# EAGLE board IoT Project (EAGLE 9.7.0)

Size 635.69 x 374.92 mm. Coordinates in mm from the lower left corner, seen from the top.
Outline: 0,0 635.69,0 635.69,374.92 0,374.92 0,0
Copper layers (1*16): Top 0.035mm / dielectric 1.5mm / Bottom 0.035mm
Design rules "default": minimum track width 6mil, minimum drill 0.35mm, track to track 6mil, track to pad 6mil, pad to pad 6mil, via to via 6mil, smd to smd 6mil, copper to edge 40mil, drill to drill 6mil, minimum pad ring 10mil, minimum via ring 8mil, stop-mask expansion 4mil, vias tented up to drill 0mil, thermal gap 10mil

## Footprints (pad centres in the part's own frame; a part is rotated, then mirrored left to right if it is on the bottom)
LEDRD254W60D565H860B_G = drill 0.981 pad 1.581: 1 -1.27,0; 2 1.27,0
LEDRD254W60D565H860B = drill 0.981 pad 1.581: 1 -1.27,0; 2 1.27,0
HC-SR04 = drill 1.016 long: 1 -3.81,0; 2 -1.27,0; 3 1.27,0; 4 3.81,0
PIEZO = drill 1 pad 1.6: 1 -3.5,0; 2 3.5,0
RESAD1016W63L850D250B = drill 0.83 pad 1.43: 1 -5.08,0; 2 5.08,0
GL5528 = drill 0.8 pad 1.4: 1 -1.702,0; 2 1.702,0
HA-06-SM065 = drill 1 pad 1.676: 1 -2.54,-2.54; 2 0,2.54; 3 2.54,-2.54
SWITCH-MOMENTARY-PTH-6.5MM = drill 1.016 pad 1.88: 1 -3.251,2.261; 2 3.251,2.261; 3 -3.251,-2.261; 4 3.251,-2.261
SG90 = drill 1.016 long: 1 -2.54,0; 2 0,0; 3 2.54,0
ARDUINO-UNO-R3-SHIELD = drill 1.016 pad 1.88: 3.3V 24.13,-2.54; 5V 24.13,0; A0 24.13,12.7; A1 24.13,15.24; A2 24.13,17.78; A3 24.13,20.32; A4 24.13,22.86; A5 24.13,25.4; AREF -24.13,-13.97; D2 -24.13,20.32; D3 -24.13,17.78; D4 -24.13,15.24; D5 -24.13,12.7; D6 -24.13,10.16; D7 -24.13,7.62; D8 -24.13,3.81; D9 -24.13,1.27; D10 -24.13,-1.27; D11 -24.13,-3.81; D12 -24.13,-6.35; D13 -24.13,-8.89; GND@0 24.13,2.54; GND@1 24.13,5.08; GND@2 -24.13,-11.43; IOREF 24.13,-7.62; NC 24.13,-10.16; RES 24.13,-5.08; RX -24.13,25.4; SCL -24.13,-19.05; SDA -24.13,-16.51; TX -24.13,22.86; VIN 24.13,7.62
JHD-162A = drill 1.016 long: 1 -19.05,0; 2 -16.51,0; 3 -13.97,0; 4 -11.43,0; 5 -8.89,0; 6 -6.35,0; 7 -3.81,0; 8 -1.27,0; 9 1.27,0; 10 3.81,0; 11 6.35,0; 12 8.89,0; 13 11.43,0; 14 13.97,0; 15 16.51,0; 16 19.05,0
TO92 = drill 0.813 octagon: 1 -1.27,0; 2 0,1.905; 3 1.27,0

## Placement (x,y rotation side)
D1  GREEN  [LEDRD254W60D565H860B_G]  487.08,83.31 180 top
D2  RED  [LEDRD254W60D565H860B]  494.7,83.31 180 top
DIST1  DISTANCE-SENSOR-4PINHC-SR04  [HC-SR04]  465.22,343.26 0 top
PIEZO1  PIEZO  [PIEZO]  472.03,123.31 0 top
R1  220  [RESAD1016W63L850D250B]  475.65,90.93 270 top
R2  1k  [RESAD1016W63L850D250B]  485.81,75.69 90 top
R3  220  [RESAD1016W63L850D250B]  331.83,315.68 270 top
R4  PHOTOCELL_GL5528  [GL5528]  363.58,313.14 0 top
R5  1k  [RESAD1016W63L850D250B]  357.23,318.22 90 top
R6  1k  [RESAD1016W63L850D250B]  349.61,318.22 90 top
R7  1k  [RESAD1016W63L850D250B]  493.43,75.69 90 top
RPOT1  250k  [HA-06-SM065]  339.45,305.52 0 top
RPOT2  250k  [HA-06-SM065]  435.01,65.53 0 top
S1  SWITCH_MOMENTARY  [SWITCH-MOMENTARY-PTH-6.5MM]  352.15,299.17 90 top
SERVO1  SERVOSG90  [SG90]  628.7,302.85 0 top
SERVO2  SERVOSG90  [SG90]  493.02,109.55 180 top
U1  ARDUINO-UNO-R3-SHIELD  [ARDUINO-UNO-R3-SHIELD]  555.94,285.34 270 top
U2  ARDUINO-UNO-R3-SHIELD  [ARDUINO-UNO-R3-SHIELD]  365.71,84.71 270 top
U3  ARDUINO-UNO-R3-SHIELD  [ARDUINO-UNO-R3-SHIELD]  47.88,345.07 270 top
U4  LCD-16X2JHD-162A  [JHD-162A]  453.4,36.63 0 top
U9  ARDUINO-UNO-R3-SHIELD  [ARDUINO-UNO-R3-SHIELD]  287.64,335.7 270 top
U10  LCD-16X2JHD-162A  [JHD-162A]  366.62,360.17 0 top
U11  TMP36GT9Z_TO92  [TO92]  387.71,305.52 0 top

## Library data of the parts
D1 = Tinkercad; CATEGORY: Opto-Electronic; SUB-CATEGORY: LED; VALUE: LED_GREEN
D2 = Tinkercad; CATEGORY: Opto-Electronic; SUB-CATEGORY: LED; VALUE: LED_RED
DIST1 PIEZO1 R1-R7 RPOT1 RPOT2 S1 SERVO1 SERVO2 U1-U4 U9-U11 = Tinkercad

## Nets
D1_C: D1.2 R2.2
D2_C: D2.2 R7.2
U1_5V: DIST1.1 SERVO1.2 U1.5V
U1_D5: SERVO1.3 U1.D5
U1_D6: DIST1.3 U1.D6
U1_D7: DIST1.2 U1.D7
U1_GND: DIST1.4 PIEZO1.2 R5.2 R6.2 RPOT1.3 RPOT2.3 SERVO1.1 SERVO2.1 U1.GND@0 U1.GND@1 U1.GND@2 U2.GND@0 U2.GND@1 U2.GND@2 U3.GND@0 U3.GND@1 U3.GND@2 U4.1 U4.5 U4.16 U9.GND@0 U9.GND@1 U9.GND@2 U10.1 U10.5 U10.16 U11.1
U2_5V: R1.1 RPOT2.1 SERVO2.2 U2.5V U4.2
U2_D2: U2.D2 U4.14
U2_D3: U2.D3 U4.13
U2_D4: U2.D4 U4.12
U2_D5: U2.D5 U4.11
U2_D6: PIEZO1.1 U2.D6
U2_D7: SERVO2.3 U2.D7
U2_D11: U2.D11 U4.6
U2_D12: U2.D12 U4.4
U3_A4: U1.A4 U2.A4 U3.A4 U9.A4
U3_A5: U1.A5 U2.A5 U3.A5 U9.A5
U4_LED+: R1.2 U4.15
U4_VO: RPOT2.2 U4.3
U9_5V: R3.1 R4.2 RPOT1.1 S1.3 S1.4 U9.5V U10.2 U11.3
U9_A1: U9.A1 U11.2
U9_A2: R4.1 R5.1 U9.A2
U9_D2: U9.D2 U10.14
U9_D3: U9.D3 U10.13
U9_D4: U9.D4 U10.12
U9_D5: U9.D5 U10.11
U9_D7: R6.1 S1.1 S1.2 U9.D7
U9_D11: U9.D11 U10.6
U9_D12: U9.D12 U10.4
U10_LED+: R3.2 U10.15
U10_VO: RPOT1.2 U10.3

## Tracks (layer width: path | path; a pad name or v marks a point on that pad's centre or on a via)
D1_C  (1 unrouted)
D2_C  (1 unrouted)
U1_5V  (2 unrouted)
U1_D5  (1 unrouted)
U1_D6  (1 unrouted)
U1_D7  (1 unrouted)
U1_GND  (26 unrouted)
U2_5V  (4 unrouted)
U2_D2  (1 unrouted)
U2_D3  (1 unrouted)
U2_D4  (1 unrouted)
U2_D5  (1 unrouted)
U2_D6  (1 unrouted)
U2_D7  (1 unrouted)
U2_D11  (1 unrouted)
U2_D12  (1 unrouted)
U3_A4  (3 unrouted)
U3_A5  (3 unrouted)
U4_LED+  (1 unrouted)
U4_VO  (1 unrouted)
U9_5V  (7 unrouted)
U9_A1  (1 unrouted)
U9_A2  (2 unrouted)
U9_D2  (1 unrouted)
U9_D3  (1 unrouted)
U9_D4  (1 unrouted)
U9_D5  (1 unrouted)
U9_D7  (3 unrouted)
U9_D11  (1 unrouted)
U9_D12  (1 unrouted)
U10_LED+  (1 unrouted)
U10_VO  (1 unrouted)